# EAGLE board toyotune_3s_lvc (EAGLE 7.7.0), part 1 of 2
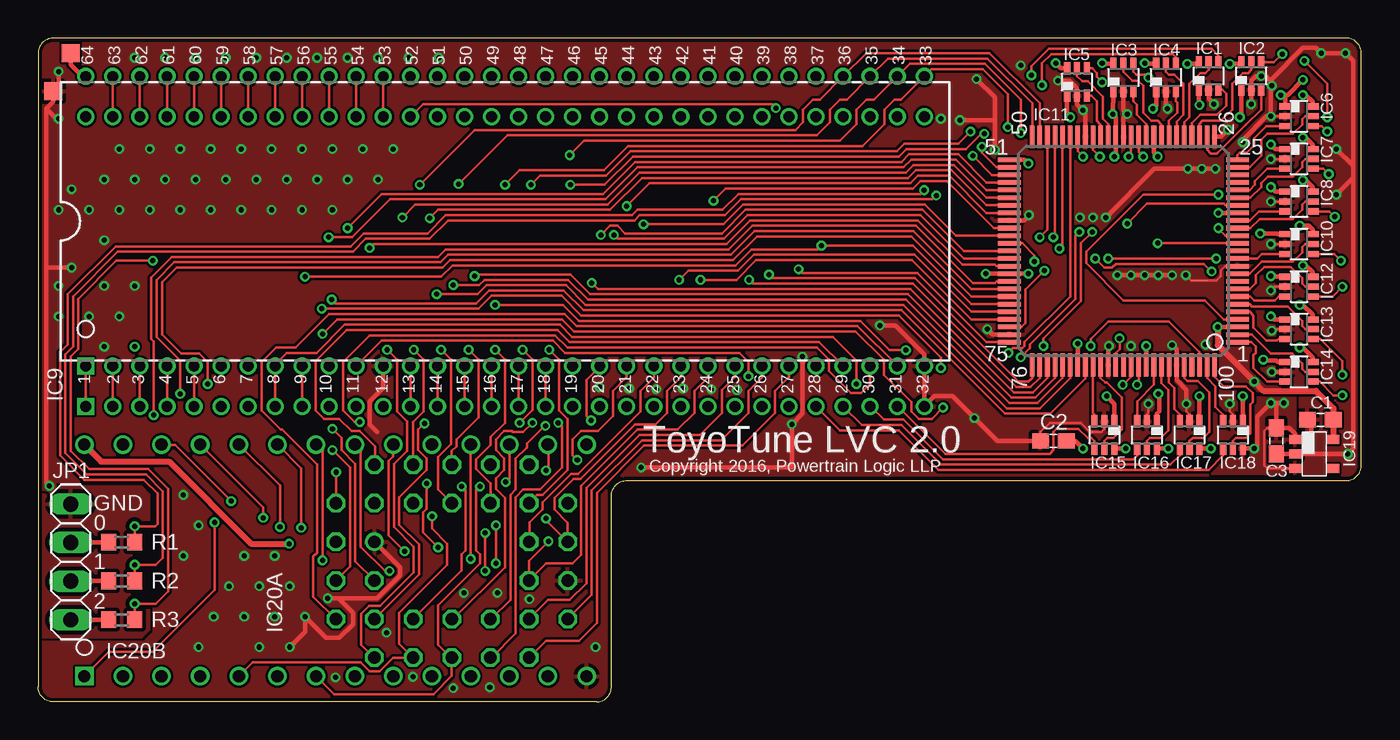
[diagram p0: board, top side]
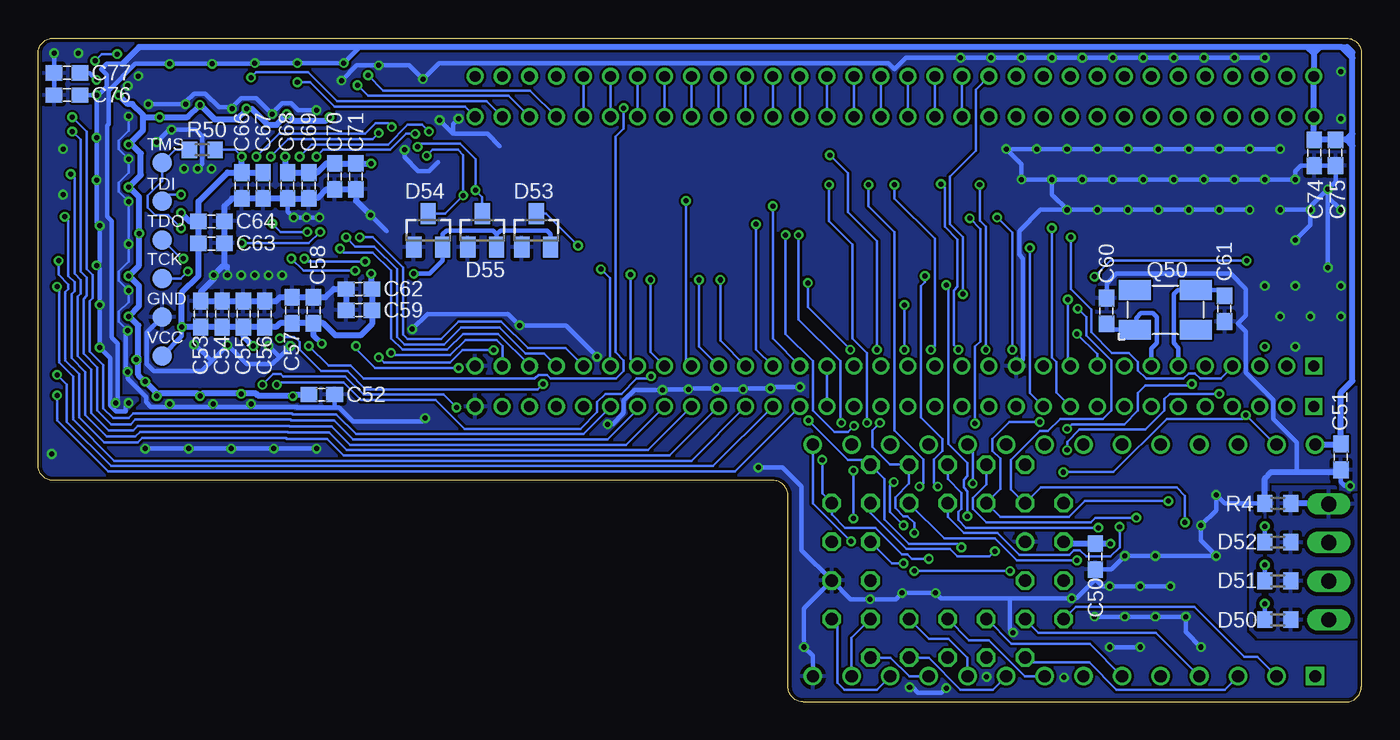
[diagram p1: board, bottom side, seen from below]

Size 87 x 43.65 mm. Coordinates in mm from the lower left corner, seen from the top.
Outline: 1.05,43.65 arc90 0,42.65 0,1 arc90 1,0 36.7,0 arc90 37.7,1 37.7,13.55 arc-90 38.7,14.55 86,14.55 arc90 87,15.55 87,42.65 arc90 86,43.65 1.05,43.65
Copper layers (1*16): Top 0.035mm / dielectric 1.5mm / Bottom 0.035mm
Design rules "pcbway": minimum track width 6mil, minimum drill 12mil, track to track 6mil, track to pad 6mil, pad to pad 6mil, via to via 6mil, smd to smd 0mil, copper to edge 10mil, drill to drill 10mil, minimum pad ring 8mil, minimum via ring 6mil, stop-mask expansion 2mil, vias tented up to drill 100mil, thermal gap 10mil

## Footprints (pad centres in the part's own frame; a part is rotated, then mirrored left to right if it is on the bottom)
C0603 = smd 1.1 x 1: 1 -0.85,0; 2 0.85,0
R0603 = smd 1 x 1.1: 1 -0.85,0; 2 0.85,0
SOT23 = smd 1 x 1.4: 1 -0.95,-1.1; 2 0.95,-1.1; 3 0,1.1
DCK_R-PDSO-G6 = smd 0.4 x 0.8: 1 -0.65,-0.9; 2 0,-0.9; 3 0.65,-0.9; 4 0.65,0.9; 5 0,0.9; 6 -0.65,0.9
SDIP-64 = drill 0.711 square: 1 -27.559,-9.525 | drill 0.711: 2 -25.781,-9.525; 3 -24.003,-9.525; 4 -22.225,-9.525; 5 -20.447,-9.525; 6 -18.669,-9.525; 7 -16.891,-9.525; 8 -15.113,-9.525; 9 -13.335,-9.525; 10 -11.557,-9.525; 11 -9.779,-9.525; 12 -8.001,-9.525; 13 -6.223,-9.525; 14 -4.445,-9.525; 15 -2.667,-9.525; 16 -0.889,-9.525; 17 0.889,-9.525; 18 2.667,-9.525; 19 4.445,-9.525; 20 6.223,-9.525; 21 8.001,-9.525; 22 9.779,-9.525; 23 11.557,-9.525; 24 13.335,-9.525; 25 15.113,-9.525; 26 16.891,-9.525; 27 18.669,-9.525; 28 20.447,-9.525; 29 22.225,-9.525; 30 24.003,-9.525; 31 25.781,-9.525; 32 27.559,-9.525; 33 27.559,9.525; 34 25.781,9.525; 35 24.003,9.525; 36 22.225,9.525; 37 20.447,9.525; 38 18.669,9.525; 39 16.891,9.525; 40 15.113,9.525; 41 13.335,9.525; 42 11.557,9.525; 43 9.779,9.525; 44 8.001,9.525; 45 6.223,9.525; 46 4.445,9.525; 47 2.667,9.525; 48 0.889,9.525; 49 -0.889,9.525; 50 -2.667,9.525; 51 -4.445,9.525; 52 -6.223,9.525; 53 -8.001,9.525; 54 -9.779,9.525; 55 -11.557,9.525; 56 -13.335,9.525; 57 -15.113,9.525; 58 -16.891,9.525; 59 -18.669,9.525; 60 -20.447,9.525; 61 -22.225,9.525; 62 -24.003,9.525; 63 -25.781,9.525; 64 -27.559,9.525
VQ100 = smd 1.5 x 0.3: 1 -7.5,6; 2 -7.5,5.5; 3 -7.5,5; 4 -7.5,4.5; 5 -7.5,4; 6 -7.5,3.5; 7 -7.5,3; 8 -7.5,2.5; 9 -7.5,2; 10 -7.5,1.5; 11 -7.5,1; 12 -7.5,0.5; 13 -7.5,0; 14 -7.5,-0.5; 15 -7.5,-1; 16 -7.5,-1.5; 17 -7.5,-2; 18 -7.5,-2.5; 19 -7.5,-3; 20 -7.5,-3.5; 21 -7.5,-4; 22 -7.5,-4.5; 23 -7.5,-5; 24 -7.5,-5.5; 25 -7.5,-6; 51 7.5,-6; 52 7.5,-5.5; 53 7.5,-5; 54 7.5,-4.5; 55 7.5,-4; 56 7.5,-3.5; 57 7.5,-3; 58 7.5,-2.5; 59 7.5,-2; 60 7.5,-1.5; 61 7.5,-1; 62 7.5,-0.5; 63 7.5,0; 64 7.5,0.5; 65 7.5,1; 66 7.5,1.5; 67 7.5,2; 68 7.5,2.5; 69 7.5,3; 70 7.5,3.5; 71 7.5,4; 72 7.5,4.5; 73 7.5,5; 74 7.5,5.5; 75 7.5,6 | smd 0.3 x 1.5: 26 -6,-7.5; 27 -5.5,-7.5; 28 -5,-7.5; 29 -4.5,-7.5; 30 -4,-7.5; 31 -3.5,-7.5; 32 -3,-7.5; 33 -2.5,-7.5; 34 -2,-7.5; 35 -1.5,-7.5; 36 -1,-7.5; 37 -0.5,-7.5; 38 0,-7.5; 39 0.5,-7.5; 40 1,-7.5; 41 1.5,-7.5; 42 2,-7.5; 43 2.5,-7.5; 44 3,-7.5; 45 3.5,-7.5; 46 4,-7.5; 47 4.5,-7.5; 48 5,-7.5; 49 5.5,-7.5; 50 6,-7.5; 76 6,7.5; 77 5.5,7.5; 78 5,7.5; 79 4.5,7.5; 80 4,7.5; 81 3.5,7.5; 82 3,7.5; 83 2.5,7.5; 84 2,7.5; 85 1.5,7.5; 86 1,7.5; 87 0.5,7.5; 88 0,7.5; 89 -0.5,7.5; 90 -1,7.5; 91 -1.5,7.5; 92 -2,7.5; 93 -2.5,7.5; 94 -3,7.5; 95 -3.5,7.5; 96 -4,7.5; 97 -4.5,7.5; 98 -5,7.5; 99 -5.5,7.5; 100 -6,7.5
DDC_R-PDSO-G5 = smd 0.6 x 0.8: 1 -0.95,-1.25; 2 0,-1.25; 3 0.95,-1.25; 4 0.95,1.25; 5 -0.95,1.25
S32 = drill 0.813: 1 1.27,5.08 | drill 0.813 octagon: 2 -1.27,7.62; 3 -1.27,5.08; 4 -3.81,7.62; 5 -6.35,5.08; 6 -3.81,5.08; 7 -6.35,2.54; 8 -3.81,2.54; 9 -6.35,0; 10 -3.81,0; 11 -6.35,-2.54; 12 -3.81,-2.54; 13 -6.35,-5.08; 14 -3.81,-7.62; 15 -3.81,-5.08; 16 -1.27,-7.62; 17 -1.27,-5.08; 18 1.27,-7.62; 19 1.27,-5.08; 20 3.81,-7.62; 21 6.35,-5.08; 22 3.81,-5.08; 23 6.35,-2.54; 24 3.81,-2.54; 25 6.35,0; 26 3.81,0; 27 6.35,2.54; 28 3.81,2.54; 29 6.35,5.08; 30 3.81,7.62; 31 3.81,5.08; 32 1.27,7.62
PDIP28 = drill 0.813 square: 1 -16.51,-7.62 | drill 0.813: 2 -13.97,-7.62; 3 -11.43,-7.62; 4 -8.89,-7.62; 5 -6.35,-7.62; 6 -3.81,-7.62; 7 -1.27,-7.62; 8 1.27,-7.62; 9 3.81,-7.62; 10 6.35,-7.62; 11 8.89,-7.62; 12 11.43,-7.62; 13 13.97,-7.62; 14 16.51,-7.62; 15 16.51,7.62; 16 13.97,7.62; 17 11.43,7.62; 18 8.89,7.62; 19 6.35,7.62; 20 3.81,7.62; 21 1.27,7.62; 22 -1.27,7.62; 23 -3.81,7.62; 24 -6.35,7.62; 25 -8.89,7.62; 26 -11.43,7.62; 27 -13.97,7.62; 28 -16.51,7.62
1X04 = drill 1.016 long: 1 -3.81,0; 2 -1.27,0; 3 1.27,0; 4 3.81,0
1X06_SMD = smd 1.27 x 1.27: GND 3.81,0; TCK 1.27,0; TDI -3.81,0; TDO -1.27,0; TMS -6.35,0; VCC 6.35,0
CRYSTAL-SMD-5X3 = smd 2.1 x 1.3: 1 -2,-1.3; 2 2,-1.3; 3 2,1.3; 4 -2,1.3
TP12SQ = smd 1.2 x 1.2: TP 0,0
SDIP-64-CONN = drill 0.711 square: 1 -27.559,-9.525 | drill 0.711: 2 -25.781,-9.525; 3 -24.003,-9.525; 4 -22.225,-9.525; 5 -20.447,-9.525; 6 -18.669,-9.525; 7 -16.891,-9.525; 8 -15.113,-9.525; 9 -13.335,-9.525; 10 -11.557,-9.525; 11 -9.779,-9.525; 12 -8.001,-9.525; 13 -6.223,-9.525; 14 -4.445,-9.525; 15 -2.667,-9.525; 16 -0.889,-9.525; 17 0.889,-9.525; 18 2.667,-9.525; 19 4.445,-9.525; 20 6.223,-9.525; 21 8.001,-9.525; 22 9.779,-9.525; 23 11.557,-9.525; 24 13.335,-9.525; 25 15.113,-9.525; 26 16.891,-9.525; 27 18.669,-9.525; 28 20.447,-9.525; 29 22.225,-9.525; 30 24.003,-9.525; 31 25.781,-9.525; 32 27.559,-9.525; 33 27.559,9.525; 34 25.781,9.525; 35 24.003,9.525; 36 22.225,9.525; 37 20.447,9.525; 38 18.669,9.525; 39 16.891,9.525; 40 15.113,9.525; 41 13.335,9.525; 42 11.557,9.525; 43 9.779,9.525; 44 8.001,9.525; 45 6.223,9.525; 46 4.445,9.525; 47 2.667,9.525; 48 0.889,9.525; 49 -0.889,9.525; 50 -2.667,9.525; 51 -4.445,9.525; 52 -6.223,9.525; 53 -8.001,9.525; 54 -9.779,9.525; 55 -11.557,9.525; 56 -13.335,9.525; 57 -15.113,9.525; 58 -16.891,9.525; 59 -18.669,9.525; 60 -20.447,9.525; 61 -22.225,9.525; 62 -24.003,9.525; 63 -25.781,9.525; 64 -27.559,9.525

## Placement (x,y rotation side)
C1  1uF  [C0603]  84.3,18.55 180 top
C2  0.1uF  [C0603]  66.75,17.15 0 top
C3  1uF  [C0603]  81.4,17.15 270 top
C50  0.1uF  [C0603]  17.5,9.55 90 bottom
C51  0.1uF  [C0603]  1.35,16.1 90 bottom
C52  0.1uF  [C0603]  68.35,20.2 180 bottom
C53  0.01uF  [C0603]  76.3,25.5 270 bottom
C54  0.1uF  [C0603]  74.9,25.5 270 bottom
C55  0.01uF  [C0603]  73.5,25.5 270 bottom
C56  0.1uF  [C0603]  72.1,25.5 270 bottom
C57  0.1uF  [C0603]  70.3,25.75 270 bottom
C58  0.01uF  [C0603]  68.9,25.75 270 bottom
C59  0.1uF  [C0603]  65.9,25.75 0 bottom
C60  10pF  [C0603]  16.75,25.7 90 bottom
C61  10pF  [C0603]  9,25.85 90 bottom
C62  0.01uF  [C0603]  65.9,27.15 0 bottom
C63  0.1uF  [C0603]  75.6,30.15 180 bottom
C64  0.01uF  [C0603]  75.6,31.6 180 bottom
C66  0.01uF  [C0603]  73.6,33.95 90 bottom
C67  0.1uF  [C0603]  72.2,33.95 90 bottom
C68  0.01uF  [C0603]  70.6,33.95 90 bottom
C69  0.1uF  [C0603]  69.2,33.95 90 bottom
C70  0.1uF  [C0603]  67.5,34.55 90 bottom
C71  0.01uF  [C0603]  66.1,34.55 90 bottom
C74  0.01uF  [C0603]  3.1,36.1 90 bottom
C75  0.1uF  [C0603]  1.7,36.1 90 bottom
C76  0.1uF  [C0603]  85.1,39.9 0 bottom
C77  0.1uF  [C0603]  85.1,41.35 0 bottom
D50  PGB1010603  [R0603]  5.5,5.4 180 bottom
D51  PGB1010603  [R0603]  5.5,7.95 180 bottom
D52  PGB1010603  [R0603]  5.5,10.5 180 bottom
D53  BAT54S  [SOT23]  54.25,31 0 bottom
D54  BAT54S  [SOT23]  61.35,31 0 bottom
D55  BAT54S  [SOT23]  57.8,31 0 bottom
IC1  SN74LVC1T45DCK  [DCK_R-PDSO-G6]  76.95,41.15 0 top
IC2  SN74LVC1T45DCK  [DCK_R-PDSO-G6]  79.75,41.15 0 top
IC3  SN74LVC1T45DCK  [DCK_R-PDSO-G6]  71.35,41.05 0 top
IC4  SN74LVC1T45DCK  [DCK_R-PDSO-G6]  74.15,41.05 0 top
IC5  SN74LVC1T45DCK  [DCK_R-PDSO-G6]  68.3,40.75 0 top
IC6  SN74LVC1T45DCK  [DCK_R-PDSO-G6]  82.9,38.5 270 top
IC7  SN74LVC1T45DCK  [DCK_R-PDSO-G6]  82.9,35.7 270 top
IC8  SN74LVC1T45DCK  [DCK_R-PDSO-G6]  82.9,32.9 270 top
IC9  D15180X-XXXX  [SDIP-64]  30.7,31.6 0 top
IC10  SN74LVC1T45DCK  [DCK_R-PDSO-G6]  82.9,30.1 270 top
IC11  XCR3128XL  [VQ100]  71.35,29.65 180 top
IC12  SN74LVC1T45DCK  [DCK_R-PDSO-G6]  82.9,27.3 270 top
IC13  SN74LVC1T45DCK  [DCK_R-PDSO-G6]  82.9,24.5 270 top
IC14  SN74LVC1T45  [DCK_R-PDSO-G6]  82.9,21.7 270 top
IC15  SN74LVC1T45DCK  [DCK_R-PDSO-G6]  70.1,17.55 180 top
IC16  SN74LVC1T45DCK  [DCK_R-PDSO-G6]  72.9,17.55 180 top
IC17  SN74LVC1T45DCK  [DCK_R-PDSO-G6]  75.7,17.55 180 top
IC18  SN74LVC1T45DCK  [DCK_R-PDSO-G6]  78.55,17.55 180 top
IC19  TLV70033  [DDC_R-PDSO-G5]  83.9,16.3 270 top
IC20A  SST39SF020WH  [S32]  27.2,9.25 90 top
IC20B  AT29C256  [PDIP28]  19.55,9.3 0 top
JP1  [1X04]  2.15,9.2 270 top
JP50  JTAG  [1X06_SMD]  78.85,29.1 270 bottom
Q50  16Mhz  [CRYSTAL-SMD-5X3]  12.89,25.77 0 bottom
R1  470R  [R0603]  5.5,10.5 180 top
R2  470R  [R0603]  5.5,7.95 180 top
R3  470R  [R0603]  5.5,5.4 180 top
R4  470R  [R0603]  5.5,13.05 180 bottom
R50  10K  [R0603]  76.2,36.3 0 bottom
TP_GND  TPSQTP12SQ  [TP12SQ]  1,40.15 0 top
TP_VCC  TPSQTP12SQ  [TP12SQ]  2.15,42.65 0 top
U1  D151803-CONN  [SDIP-64-CONN]  30.7,28.95 0 top

## Library data of the parts
C1-C3 C50-C64 C66-C71 C74-C77 D50-D55 IC1-IC18 IC20A IC20B JP1 JP50 Q50 R1-R4 R50 U1 = toyotune
IC19 = toyota-ecu
TP_GND TP_VCC = testpad

## Nets
!D_HALT: IC9.51 U1.51
!D_INIT: IC9.52 IC11.81
!D_IRL: IC9.5 U1.5
!D_IRP: IC9.4 IC11.55 U1.4
!D_NMI: IC9.3 U1.3
!D_RD: IC9.10 IC11.83
!D_TEST: IC9.49 U1.49
!D_WDC: IC9.53 U1.53
!D_WI: IC9.50 U1.50
!D_WR: IC9.11 IC11.89
!E_INIT: IC11.98 U1.52
!E_IS: IC11.54 U1.10
!E_OS: IC11.65 U1.11
!M_RD: IC11.14 IC20A.24 IC20B.22
!M_ROM_CS: IC11.78 IC20A.22 IC20B.20
!M_WR/M_A15: IC11.19 IC20A.31 IC20B.1
C_DRA0: IC1.5 IC11.30
C_DRA1: IC4.5 IC11.31
C_DRA2: IC3.5 IC11.33
C_DRA3: IC5.5 IC11.40
C_DRA4: IC11.85 IC15.5
C_DRA5: IC11.93 IC16.5
C_DRA6: IC11.96 IC17.5
C_DRA7: IC11.100 IC18.5
C_DRB0: IC2.5 IC11.28
C_DRB1: IC6.5 IC11.24
C_DRB2: IC7.5 IC11.20
C_DRB3: IC8.5 IC11.16
C_DRB4: IC10.5 IC11.10
C_DRB5: IC11.8 IC12.5
C_DRB6: IC11.6 IC13.5
C_DRB7: IC11.2 IC14.5
C_PA0: IC1.3 IC11.29
C_PA1: IC4.3 IC11.32
C_PA2: IC3.3 IC11.35
C_PA3: IC5.3 IC11.41
C_PA4: IC11.84 IC15.3
C_PA5: IC11.92 IC16.3
C_PA6: IC11.94 IC17.3
C_PA7: IC11.99 IC18.3
C_PB0: IC2.3 IC11.27
C_PB1: IC6.3 IC11.25
C_PB2: IC7.3 IC11.21
C_PB3: IC8.3 IC11.17
C_PB4: IC10.3 IC11.12
C_PB5: IC11.7 IC12.3
C_PB6: IC11.5 IC13.3
C_PB7: IC11.1 IC14.3
D1_XIN: C61.2 IC9.6 Q50.3
D1_XOUT: C60.1 IC9.7 Q50.1
D_A8: IC9.36 IC11.49 IC20A.27 IC20B.25
D_A9: IC9.35 IC11.50 IC20A.26 IC20B.24
D_A10: IC9.34 IC11.37 IC20A.23 IC20B.21
D_A11: IC9.33 IC11.36 IC20A.25 IC20B.23
D_A12: IC9.31 IC11.45 IC20A.4 IC20B.2
D_A13: IC9.30 IC11.46 IC20A.28 IC20B.26
D_A14: IC9.29 IC11.47 IC20A.29
D_A15: IC9.28 IC11.48
D_ADR: IC9.9 IC11.90 U1.9
D_AL0: IC11.64 IC20A.12 IC20B.10
D_AL1: IC11.63 IC20A.11 IC20B.9
D_AL2: IC11.44 IC20A.10 IC20B.8
D_AL3: IC11.42 IC20A.9 IC20B.7
D_AL4: IC11.79 IC20A.8 IC20B.6
D_AL5: IC11.80 IC20A.7 IC20B.5
D_AL6: IC11.57 IC20A.6 IC20B.4
D_AL7: IC11.56 IC20A.5 IC20B.3
D_ASR0: IC9.2 U1.2
D_ASR1: IC9.1 U1.1
D_ASR2: IC9.63 U1.63
D_ASR3: IC9.62 U1.62
D_CCLK: IC9.8 IC11.87 U1.8
D_DA0: IC9.27 IC11.75 IC20A.13 IC20B.11
D_DA1: IC9.26 IC11.76 IC20A.14 IC20B.12
D_DA2: IC9.25 IC11.77 IC20A.15 IC20B.13
D_DA3: IC9.24 IC11.60 IC20A.17 IC20B.15
D_DA4: IC9.23 IC11.72 IC20A.18 IC20B.16
D_DA5: IC9.22 IC11.71 IC20A.19 IC20B.17
D_DA6: IC9.21 IC11.61 IC20A.20 IC20B.18
D_DA7: IC9.20 IC11.58 IC20A.21 IC20B.19
D_DOUT0: IC9.61 U1.61
D_DOUT1: IC9.60 U1.60
D_DOUT2: IC9.59 U1.59
D_DOUT3: IC9.58 U1.58
D_DOUT4: IC9.57 U1.57
D_DOUT5: IC9.56 U1.56
D_DOUT6: IC9.55 U1.55
D_DOUT7: IC9.54 U1.54
D_PA0: IC1.4 U1.36
D_PA1: IC4.4 U1.35
D_PA2: IC3.4 U1.34
D_PA3: IC5.4 U1.33
D_PA4: IC15.4 U1.31
D_PA5: IC16.4 U1.30
D_PA6: IC17.4 U1.29
D_PA7: IC18.4 U1.28
D_PB0: IC2.4 U1.27
D_PB1: IC6.4 U1.26
D_PB2: IC7.4 U1.25
D_PB3: IC8.4 U1.24
D_PB4: IC10.4 U1.23
D_PB5: IC12.4 U1.22
D_PB6: IC13.4 U1.21
D_PB7: IC14.4 U1.20
D_PC0: IC9.48 U1.48
D_PC1: IC9.47 U1.47
D_PC2: IC9.46 U1.46
D_PC3: IC9.45 U1.45
D_PC4: IC9.44 U1.44
D_PC5: IC9.43 U1.43
D_PC6: IC9.42 U1.42
D_PC7: IC9.41 U1.41
D_PD0: IC9.40 U1.40
D_PD1: IC9.39 U1.39
D_PD2: IC9.38 U1.38
D_PD3: IC9.37 U1.37
D_SCLK: IC9.13 U1.13
D_SIN0: IC9.17 U1.17
D_SIN1: IC9.16 U1.16
D_SIN2: IC9.15 U1.15
D_SIN3: IC9.14 U1.14
D_SOUT0: IC9.19 U1.19
D_SOUT1: IC9.18 U1.18
GND: C1.2 C2.1 C3.2 C50.1 C51.1 C52.1 C53.1 C54.1 C55.1 C56.1 C57.1 C58.1 C59.1 C60.2 C61.1 C62.1 C63.1 C64.1 C66.1 C67.1 C68.1 C69.1 C70.1 C71.1 C74.1 C75.1 C76.1 C77.1 D53.1 D54.1 D55.1 IC1.2 IC2.2 IC3.2 IC4.2 IC5.2 IC6.2 IC7.2 IC8.2 IC9.12 IC9.32 IC10.2 IC11.11 IC11.26 IC11.38 IC11.43 IC11.59 IC11.74 IC11.86 IC11.95 IC12.2 IC13.2 IC14.2 IC15.2 IC16.2 IC17.2 IC18.2 IC19.2 IC20A.1 IC20A.16 IC20B.14 JP50.GND R4.2 TP_GND.TP U1.32
M_A15: IC11.69 IC20A.3
M_A16: IC11.68 IC20A.2
M_A17/M_A14: IC11.67 IC20A.30 IC20B.27
MSEL0: D52.2 D55.3 IC11.52 R1.1
MSEL0_ECU: JP1.2 R1.2
MSEL1: D51.2 D54.3 IC11.53 R2.1
MSEL1_ECU: JP1.3 R2.2
MSEL2: D50.2 D53.3 IC11.70 R3.1
MSEL2_ECU: JP1.4 R3.2
N$28: U1.6
N$29: U1.7
N$30: U1.12
NC1: IC11.13
NC2: IC11.22
NC3: IC11.23
NC4: IC11.9
NC5: IC11.88
NC6: IC11.97
SGND: D50.1 D51.1 D52.1 JP1.1 R4.1
TCK: IC11.62 JP50.TCK
TDI: IC11.4 JP50.TDI
TDO: IC11.73 JP50.TDO
TMS: IC11.15 JP50.TMS R50.1
VCC: C2.2 C3.1 C50.2 C51.2 C74.2 C75.2 C76.2 IC1.6 IC2.6 IC3.6 IC4.6 IC5.6 IC6.6 IC7.6 IC8.6 IC9.64 IC10.6 IC12.6 IC13.6 IC14.6 IC15.6 IC16.6 IC17.6 IC18.6 IC19.1 IC19.3 IC20A.32 IC20B.28 TP_VCC.TP U1.64
VCC_CPLD: C1.1 C52.2 C53.2 C54.2 C55.2 C56.2 C57.2 C58.2 C59.2 C62.2 C63.2 C64.2 C66.2 C67.2 C68.2 C69.2 C70.2 C71.2 C77.2 D53.2 D54.2 D55.2 IC1.1 IC2.1 IC3.1 IC4.1 IC5.1 IC6.1 IC7.1 IC8.1 IC10.1 IC11.3 IC11.18 IC11.34 IC11.39 IC11.51 IC11.66 IC11.82 IC11.91 IC12.1 IC13.1 IC14.1 IC15.1 IC16.1 IC17.1 IC18.1 IC19.5 JP50.VCC R50.2